# EAGLE board 12VAttinyDischargeChecker-AS1 (EAGLE 8.5.2)
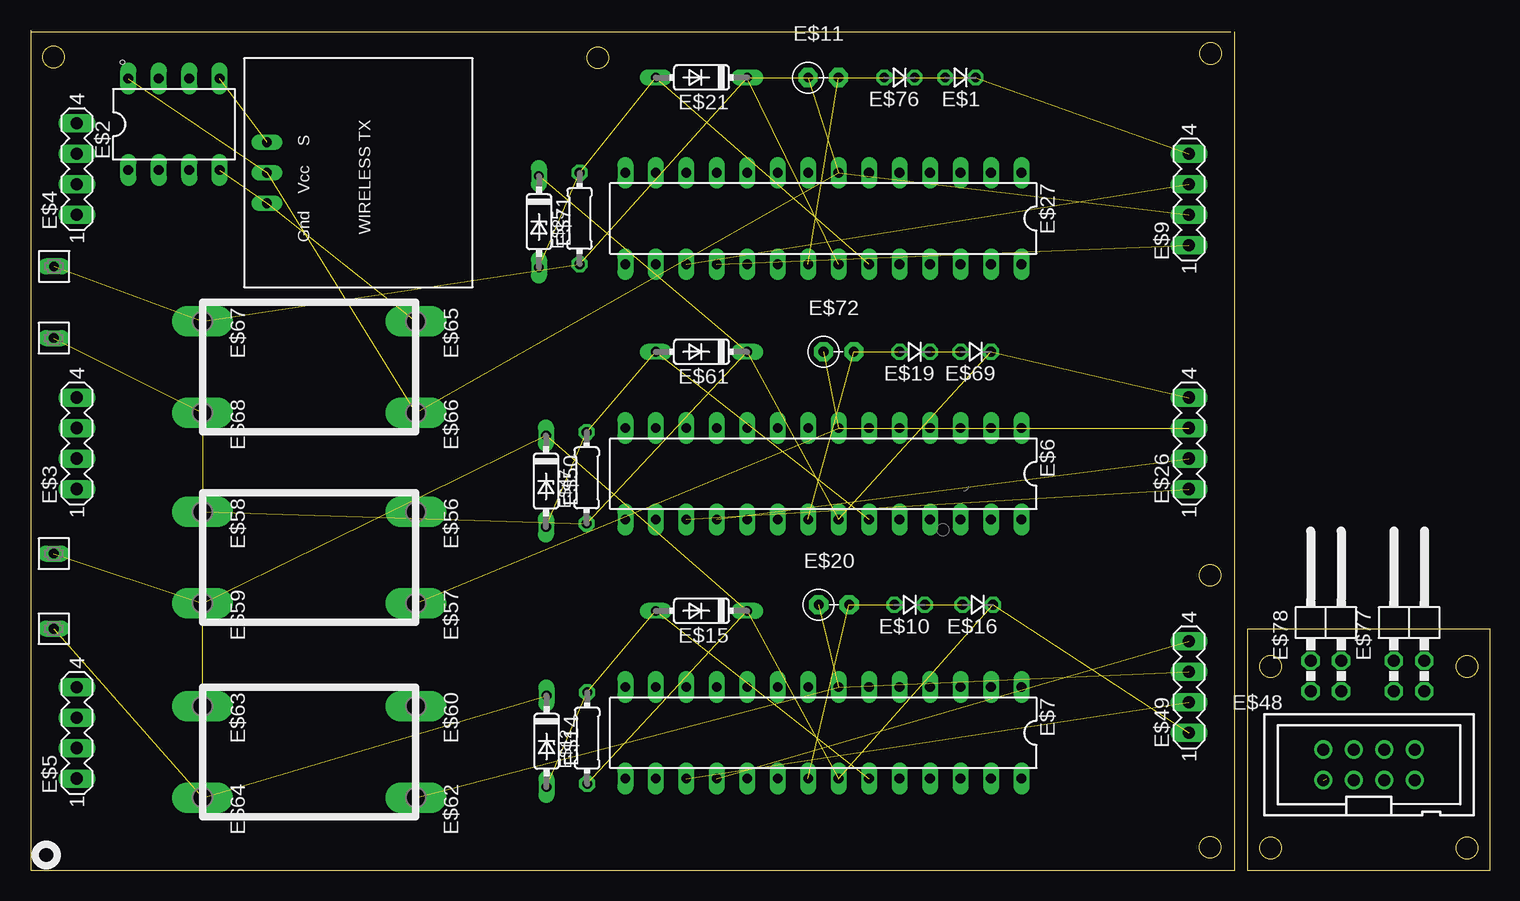
[diagram p0: board, top side]
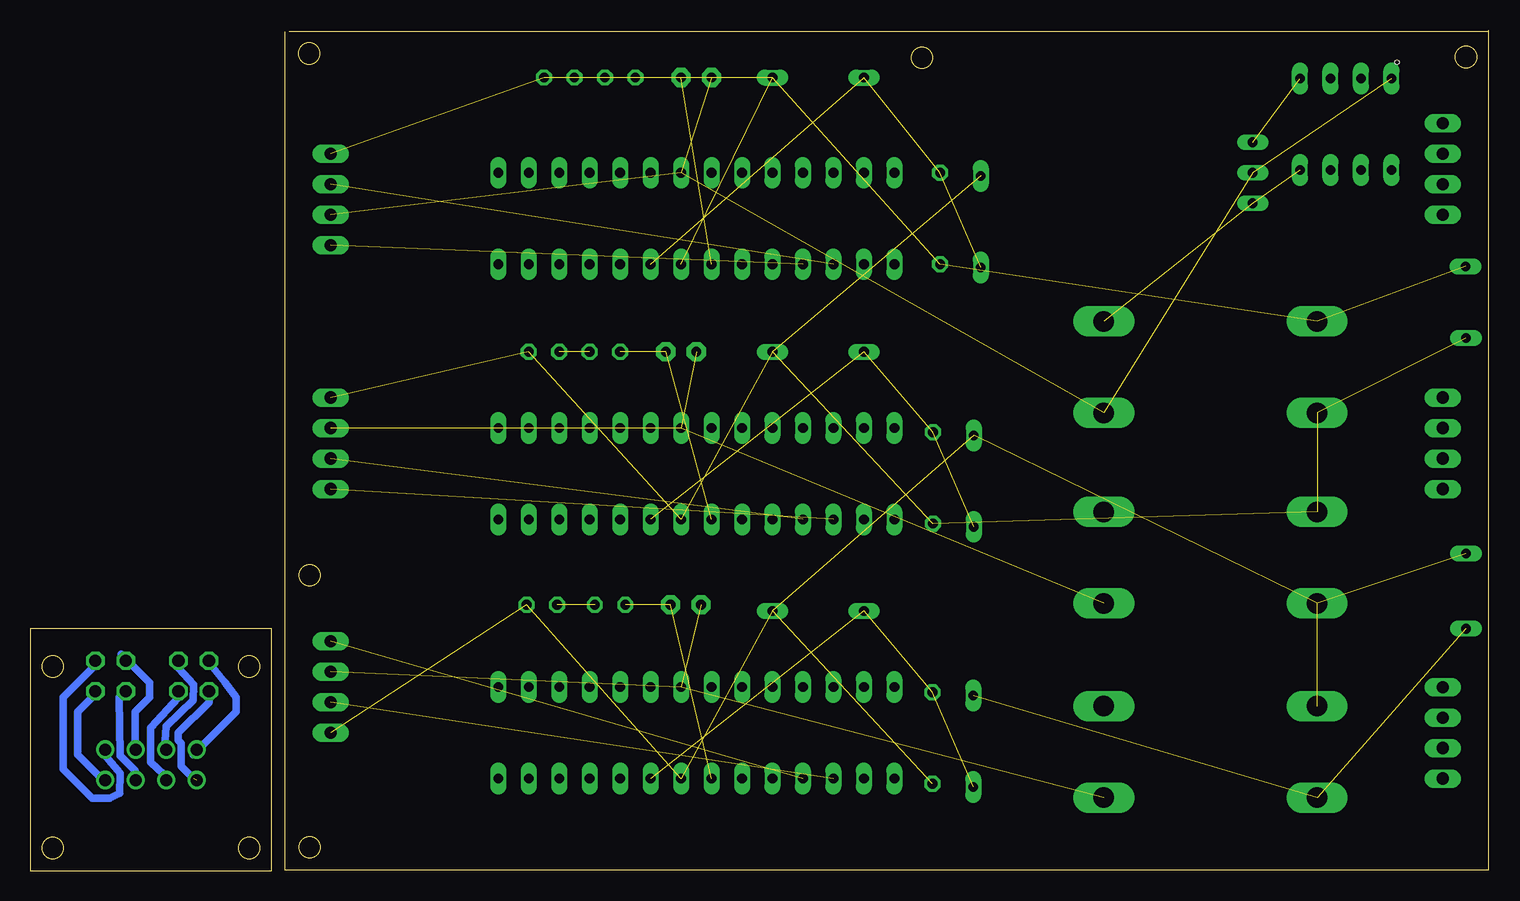
[diagram p1: board, bottom side, seen from below]

Size 121.58 x 70.05 mm. Coordinates in mm from the lower left corner, seen from the top.
Outline: 0,69.9 0,0.05 100.33,0.05 100.33,69.9
Outline: 0,69.9 0,70.05
Outline: 0,69.9 100,69.9
Outline: 101.42,0 101.42,20.17 121.58,20.17 121.58,0 101.42,0
Outline: circle at 119.69,17.01 radius 0.89
Outline: circle at 103.31,17.01 radius 0.89
Outline: circle at 103.31,1.89 radius 0.89
Outline: circle at 119.69,1.89 radius 0.89
Outline: circle at 98.28,1.94 radius 0.89
Outline: circle at 98.28,24.62 radius 0.89
Outline: circle at 1.87,67.8 radius 0.89
Outline: circle at 47.23,67.74 radius 0.89
Outline: circle at 98.31,68.09 radius 0.89
Copper layers (1*16): Top 0.035mm / dielectric 1.5mm / Bottom 0.035mm
Design rules "default": minimum track width 10mil, minimum drill 24mil, track to track 8mil, track to pad 8mil, pad to pad 8mil, via to via 8mil, smd to smd 8mil, copper to edge 40mil, drill to drill 8mil, minimum pad ring 10mil, minimum via ring 8mil, stop-mask expansion 4mil, vias tented up to drill 0mil, thermal gap 10mil
Holes 0.35 mm at 7.62,67.36

## Footprints (pad centres in the part's own frame; a part is rotated, then mirrored left to right if it is on the bottom)
D-2.5 = drill 0.813 octagon: A 1.27,0; C -1.27,0
DIL08 = drill 0.813 long: 1 -3.81,-3.81; 2 -1.27,-3.81; 3 1.27,-3.81; 4 3.81,-3.81; 5 3.81,3.81; 6 1.27,3.81; 7 -1.27,3.81; 8 -3.81,3.81
MA04-1 = drill 1.016 long: 1 -3.81,0; 2 -1.27,0; 3 1.27,0; 4 3.81,0
DIL28-3 = drill 0.813 long: 1 -16.51,-3.81; 2 -13.97,-3.81; 3 -11.43,-3.81; 4 -8.89,-3.81; 5 -6.35,-3.81; 6 -3.81,-3.81; 7 -1.27,-3.81; 8 1.27,-3.81; 9 3.81,-3.81; 10 6.35,-3.81; 11 8.89,-3.81; 12 11.43,-3.81; 13 13.97,-3.81; 14 16.51,-3.81; 15 16.51,3.81; 16 13.97,3.81; 17 11.43,3.81; 18 8.89,3.81; 19 6.35,3.81; 20 3.81,3.81; 21 1.27,3.81; 22 -1.27,3.81; 23 -3.81,3.81; 24 -6.35,3.81; 25 -8.89,3.81; 26 -11.43,3.81; 27 -13.97,3.81; 28 -16.51,3.81
RS-2,5 = drill 0.813 pad 1.6 octagon: 1 -1.27,0; 2 1.27,0
0204/7 = drill 0.813 octagon: 1 -3.81,0; 2 3.81,0
DO35Z7 = drill 0.813 long: A 3.81,0; C -3.81,0
DO35-7A = drill 0.813 long: A 3.81,0; C -3.81,0
WIRELESS-TX-FLAT = drill 0.8 long: P$1 0.635,-6.35; P$2 -1.905,-6.35; P$3 3.175,-6.35
FE01-1 = drill 0.813 long: 1 -1.27,0
PAK100/2500-8 = drill 1 pad 1.422: 3 -2.54,-1.27; 4 -2.54,1.27; 5 0,-1.27; 6 0,1.27; 7 2.54,-1.27; 8 2.54,1.27; 9 5.08,-1.27; 10 5.08,1.27
P1-17Y = drill 1.702 pad 2.121 long: TP 0,0
2X02/90 = drill 1.016 octagon: 1 -1.27,-6.35; 2 -1.27,-3.81; 3 1.27,-6.35; 4 1.27,-3.81

## Placement (x,y rotation side)
E$1  [D-2.5]  77.47,66.09 180 top
E$2  [DIL08]  11.9,62.19 0 top
E$3  [MA04-1]  3.81,35.61 90 top
E$4  [MA04-1]  3.81,58.47 90 top
E$5  [MA04-1]  3.81,11.48 90 top
E$6  [DIL28-3]  66.04,33.07 180 top
E$7  [DIL28-3]  66.04,11.48 180 top
E$9  [MA04-1]  96.52,55.93 90 top
E$10  [D-2.5]  73.23,22.15 180 top
E$11  [RS-2,5]  66.04,66.09 0 top
E$12  220  [0204/7]  46.35,11.05 90 top
E$14  Zener 12v  [DO35Z7]  42.96,10.78 270 top
E$15  [DO35-7A]  55.88,21.64 180 top
E$16  [D-2.5]  78.91,22.15 180 top
E$19  [D-2.5]  73.66,43.23 180 top
E$20  [RS-2,5]  66.92,22.15 0 top
E$21  Zener 5V  [DO35-7A]  55.88,66.09 180 top
E$25  220  [0204/7]  45.72,54.34 90 top
E$26  [MA04-1]  96.52,35.61 90 top
E$27  [DIL28-3]  66.04,54.34 180 top
E$32  [WIRELESS-TX-FLAT]  26,58.79 270 top
E$35  [FE01-1]  1.89,25.14 270 top
E$41  [FE01-1]  1.89,18.89 270 top
E$44  [FE01-1]  1.89,43.1 270 top
E$46  [FE01-1]  1.91,51.62 90 top
E$47  220  [0204/7]  46.31,32.73 90 top
E$48  [PAK100/2500-8]  110.25,8.82 0 top
E$49  [MA04-1]  96.52,15.29 90 top
E$50  Zener 12v  [DO35Z7]  42.91,32.46 270 top
E$56  [P1-17Y]  32.07,29.89 270 top
E$57  [P1-17Y]  32.07,22.28 270 top
E$58  [P1-17Y]  14.29,29.89 270 top
E$59  [P1-17Y]  14.29,22.28 270 top
E$60  [P1-17Y]  32.07,13.7 270 top
E$61  [DO35-7A]  55.88,43.23 180 top
E$62  [P1-17Y]  32.07,6.08 270 top
E$63  [P1-17Y]  14.29,13.7 270 top
E$64  [P1-17Y]  14.29,6.08 270 top
E$65  [P1-17Y]  32.07,45.77 270 top
E$66  [P1-17Y]  32.07,38.15 270 top
E$67  [P1-17Y]  14.29,45.77 270 top
E$68  [P1-17Y]  14.29,38.15 270 top
E$69  [D-2.5]  78.74,43.23 180 top
E$70  [LOGO]  -39.37,56.56 0 top  (outside the outline)
E$71  Zener 12v  [DO35Z7]  42.33,54.07 270 top
E$72  [RS-2,5]  67.31,43.23 0 top
E$73  [LOGO]  75.52,35.81 270 top
E$76  [D-2.5]  72.39,66.09 180 top
E$77  [2X02/90]  114.86,21.3 0 top
E$78  [2X02/90]  107.94,21.3 0 top

## Library data of the parts
E$1 E$10 E$14 E$16 E$19 E$50 E$69 E$71 E$76 = ref-packages
E$2 E$6 E$7 E$27 = 74xx-us
E$3-E$5 E$9 E$26 E$49 = con-lstb
E$11 E$20 E$72 = discrete
E$12 E$25 E$47 = eagle-ltspice
E$15 E$21 E$61 = diode
E$32 = LSGPackages
E$35 E$41 E$44 E$46 = con-lsta2
E$48 = con-3m
E$56-E$60 E$62-E$68 = testpad
E$70 E$73 = atmel
E$77 E$78 = pinhead

## Nets
S$2: E$6.22 E$26.4 E$44.1 E$47.1 E$58.TP E$61.C E$68.TP E$69.C E$71.C
S$3: E$2.4 E$32.P$3 E$65.TP
S$4: E$11.2 E$27.21 E$76.A
S$5: E$1.A E$76.C
S$7: E$14.C E$41.1 E$64.TP
S$9: E$9.3 E$27.17
S$13: E$9.1 E$27.18
S$14: E$6.18 E$26.2
S$15: E$2.8 E$9.2 E$11.1 E$27.7 E$32.P$1 E$66.TP
S$16: E$2.5 E$32.P$2
S$18: E$6.23 E$47.2 E$50.A E$61.A
S$21: E$7.23 E$12.2 E$14.A E$15.A
S$22: E$21.A E$25.2 E$27.23 E$71.A
S$24: E$7.22 E$12.1 E$15.C E$16.C E$35.1 E$49.1 E$50.C E$59.TP E$63.TP
S$27: E$6.17 E$26.1
S$28: E$6.7 E$26.3 E$57.TP E$72.1
S$30: E$7.18 E$49.4
S$31: E$7.17 E$49.2
S$32: E$7.7 E$20.1 E$49.3 E$62.TP
S$36: E$7.21 E$10.A E$20.2
S$37: E$1.C E$9.4 E$21.C E$25.1 E$27.22 E$46.1 E$67.TP
S$41: E$10.C E$16.A
S$42: E$6.21 E$19.A E$72.2
S$43: E$48.10 E$77.4
S$44: E$48.9 E$77.3
S$45: E$19.C E$69.A
S$51: E$48.8 E$77.2
S$52: E$48.7 E$77.1
S$53: E$48.6 E$78.4
S$54: E$48.5 E$78.3
S$55: E$48.4 E$78.2
S$56: E$48.3 E$78.1

## Tracks (layer width: path | path; a pad name or v marks a point on that pad's centre or on a via)
S$2  (8 unrouted)
S$3  (2 unrouted)
S$4  (2 unrouted)
S$5  (1 unrouted)
S$7  (2 unrouted)
S$9  (1 unrouted)
S$13  (1 unrouted)
S$14  (1 unrouted)
S$15  (5 unrouted)
S$16  (1 unrouted)
S$18  (3 unrouted)
S$21  (3 unrouted)
S$22  (3 unrouted)
S$24  (8 unrouted)
S$27  (1 unrouted)
S$28  (3 unrouted)
S$30  (1 unrouted)
S$31  (1 unrouted)
S$32  (3 unrouted)
S$36  (2 unrouted)
S$37  (6 unrouted)
S$41  (1 unrouted)
S$42  (2 unrouted)
S$43
  Bottom 0.61: E$48.10 115.23,9.48 114.06,8.12 114.1,6.46 114.95,6.05 116.4,6.05 118.8,8.45 118.8,14.45 116.4,16.85 E$77.4
S$44
  Bottom 0.61: E$48.9 115.2,7.25 117.6,9.65 117.6,13.25 116.4,14.45 E$77.3
S$45  (1 unrouted)
S$51
  Bottom 0.61: E$48.8 112.8,9.65 112.8,13.25 111.6,14.45 111.6,15.65 114,18.05 E$77.2
S$52
  Bottom 0.61: E$48.7 112.8,7.25 112.8,8.34 114.08,9.56 114.16,14.45 E$77.1
S$53
  Bottom 0.61: E$48.6 110.4,9.65 110.24,12.05 108,14.21 107.95,15.5 109.2,16.85 E$78.4
S$54
  Bottom 0.61: E$48.5 110.4,7.25 110.4,7.98 111.5,9.02 111.5,11.89 109.2,14.45 E$78.3
S$55
  Bottom 0.61: E$48.4 108,9.65 104.4,13.25 104.4,14.45 105.33,15.67 106.66,17.33 E$78.2
S$56  (1 unrouted)
  Bottom 0.61: E$78.1 106.67,14.04 109.22,11.48 109.22,10.85 108.98,10.61 108.98,8.7 107.95,7.67

## Text on the board
bTest: B0 | B0 | 0v | In- | Out- | 14v | B1 | Out+ | In+ | B2 | In- | Out- | 28v | In+ | Out+ | 42v | B2 | In- | Out- | B1 | Vi | V | A | M | G | R | In+ | Bi | B | Out+